# EAGLE board I2C shifter panelized (EAGLE 7.6.0)
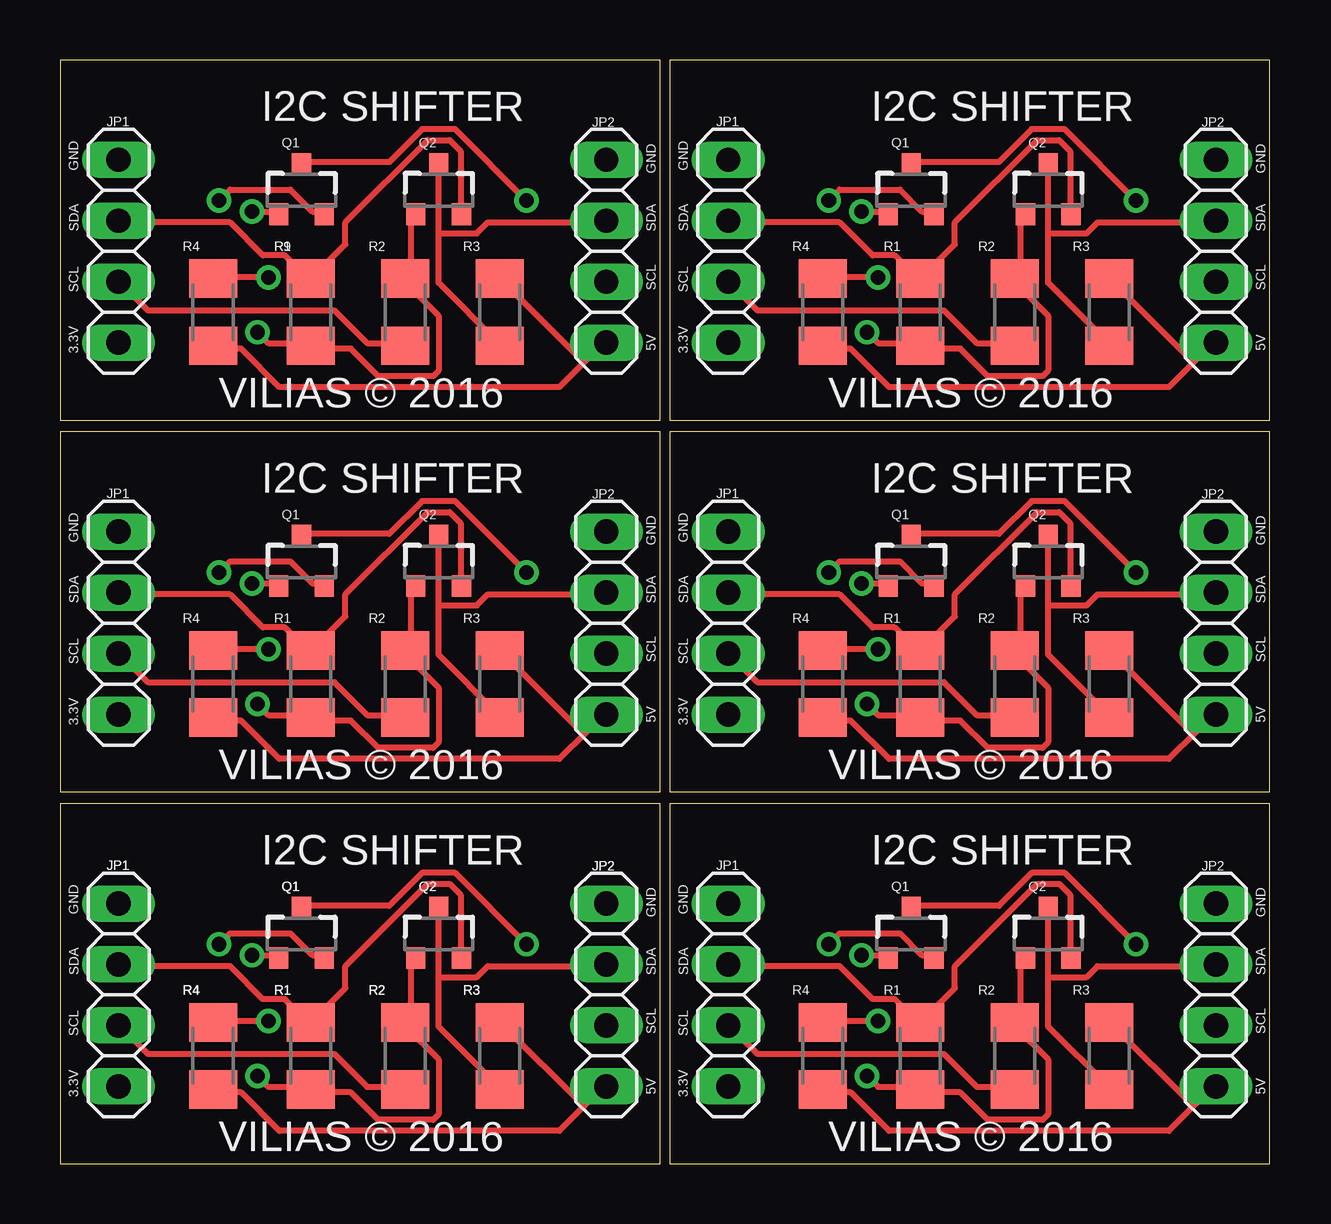
[diagram p0: board, top side]
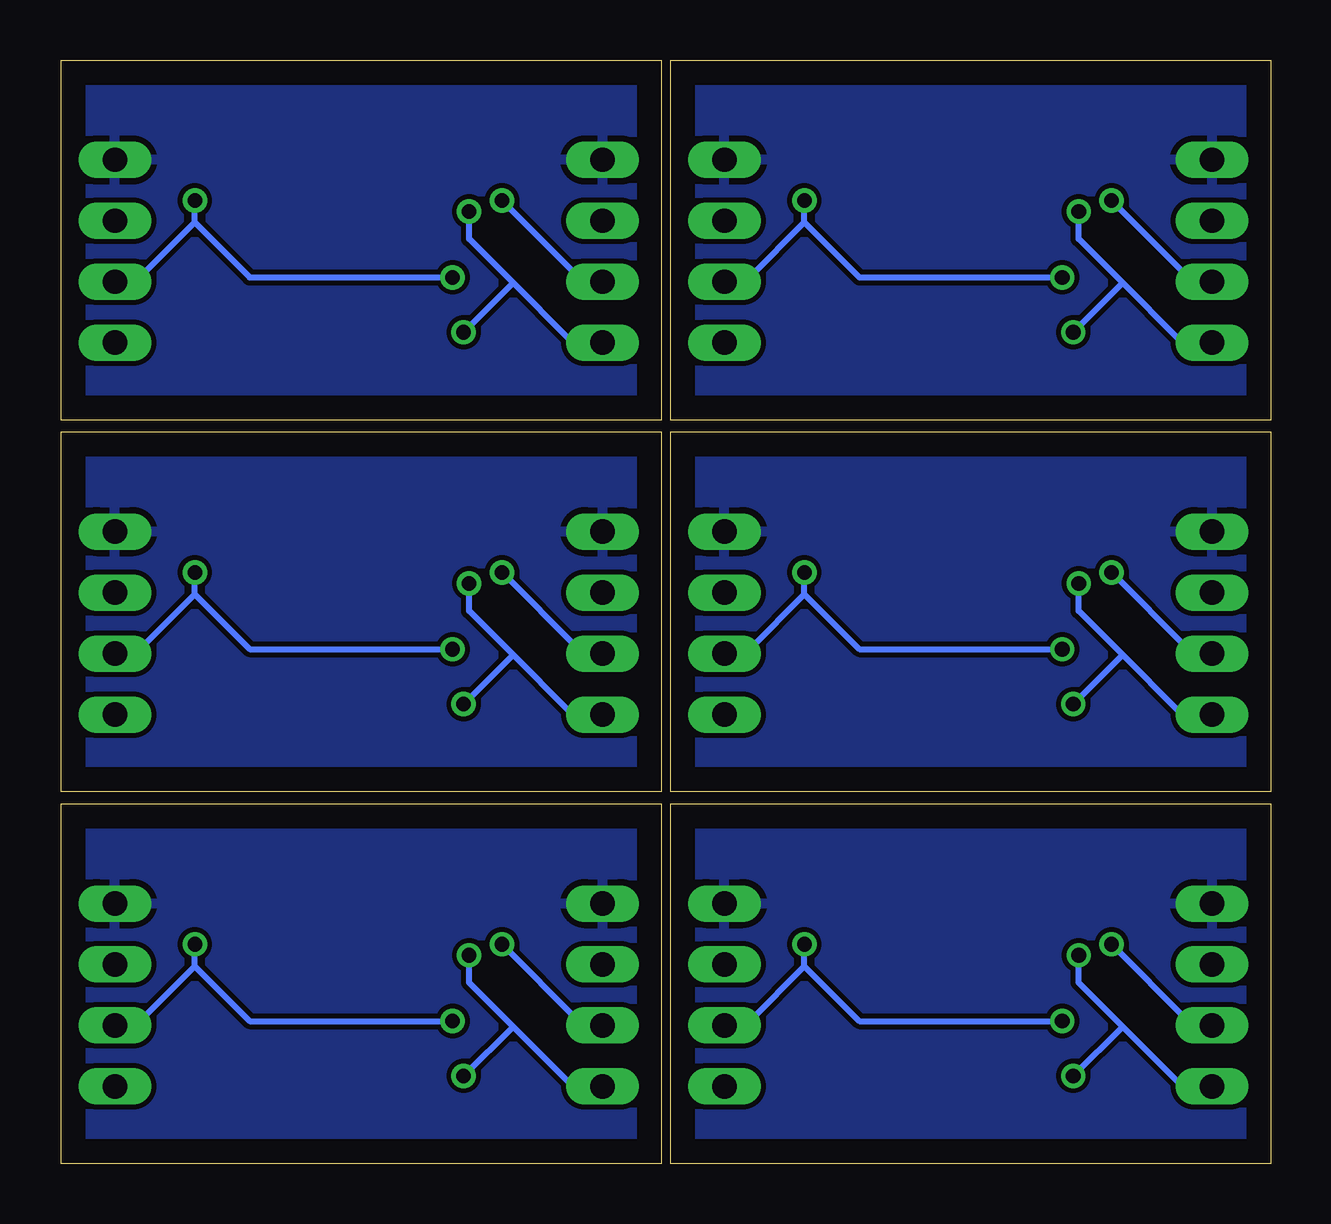
[diagram p1: board, bottom side, seen from below]

Size 50.4 x 45.99 mm. Coordinates in mm from the lower left corner, seen from the top.
Outline: 0,0 25,0 25,15 0,15 0,0
Outline: 0,15.49 25,15.49 25,30.49 0,30.49 0,15.49
Outline: 0,30.99 25,30.99 25,45.99 0,45.99 0,30.99
Outline: 25.4,0 50.4,0 50.4,15 25.4,15 25.4,0
Outline: 25.4,15.49 50.4,15.49 50.4,30.49 25.4,30.49 25.4,15.49
Outline: 25.4,30.99 50.4,30.99 50.4,45.99 25.4,45.99 25.4,30.99
Copper layers (1*16): Top 0.035mm / dielectric 1.5mm / Bottom 0.035mm
Design rules "default": minimum track width 10mil, minimum drill 24mil, track to track 8mil, track to pad 8mil, pad to pad 8mil, via to via 8mil, smd to smd 8mil, copper to edge 40mil, drill to drill 8mil, minimum pad ring 10mil, minimum via ring 8mil, stop-mask expansion 4mil, vias tented up to drill 0mil, thermal gap 10mil

## Footprints (pad centres in the part's own frame; a part is rotated, then mirrored left to right if it is on the bottom)
1X04 = drill 1.016 long: 1 -3.81,0; 2 -1.27,0; 3 1.27,0; 4 3.81,0
SOT23-3 = smd 0.8 x 0.9: 1 -0.95,-1; 2 0.95,-1; 3 0,1.1
M1206 = smd 1.6 x 2: 1 -1.4,0; 2 1.4,0

## Placement (x,y rotation side)
JP1  3.3V  [1X04]  2.44,7.03 90 top
JP2  5V  [1X04]  22.76,7.03 90 top
JP3  3.3V  [1X04]  2.44,22.53 90 top
JP4  5V  [1X04]  22.76,22.53 90 top
JP5  3.3V  [1X04]  2.44,38.02 90 top
JP6  5V  [1X04]  22.76,38.02 90 top
JP7  3.3V  [1X04]  27.84,7.03 90 top
JP8  5V  [1X04]  48.16,7.03 90 top
JP9  3.3V  [1X04]  27.84,22.53 90 top
JP10  5V  [1X04]  48.16,22.53 90 top
JP11  3.3V  [1X04]  27.84,38.02 90 top
JP12  5V  [1X04]  48.16,38.02 90 top
Q1  BSS138  [SOT23-3]  10.06,9.57 0 top
Q2  BSS138  [SOT23-3]  15.78,9.57 0 top
Q3  BSS138  [SOT23-3]  10.06,25.07 0 top
Q4  BSS138  [SOT23-3]  15.78,25.07 0 top
Q5  BSS138  [SOT23-3]  10.06,40.56 0 top
Q6  BSS138  [SOT23-3]  15.78,40.56 0 top
Q7  BSS138  [SOT23-3]  35.46,9.57 0 top
Q8  BSS138  [SOT23-3]  41.18,9.57 0 top
Q9  BSS138  [SOT23-3]  35.46,25.07 0 top
Q10  BSS138  [SOT23-3]  41.18,25.07 0 top
Q11  BSS138  [SOT23-3]  35.46,40.56 0 top
Q12  BSS138  [SOT23-3]  41.18,40.56 0 top
R1  10K  [M1206]  10.44,4.49 270 top
R2  10K  [M1206]  14.38,4.49 90 top
R3  10K  [M1206]  18.32,4.49 90 top
R4  10K  [M1206]  6.38,4.49 270 top
R5  10K  [M1206]  10.44,19.99 270 top
R6  10K  [M1206]  14.38,19.99 90 top
R7  10K  [M1206]  18.32,19.99 90 top
R8  10K  [M1206]  6.38,19.99 270 top
R9  10K  [M1206]  10.44,35.48 270 top
R10  10K  [M1206]  14.38,35.48 90 top
R11  10K  [M1206]  18.32,35.48 90 top
R12  10K  [M1206]  6.38,35.48 270 top
R13  10K  [M1206]  35.84,4.49 270 top
R14  10K  [M1206]  39.78,4.49 90 top
R15  10K  [M1206]  43.72,4.49 90 top
R16  10K  [M1206]  31.78,4.49 270 top
R17  10K  [M1206]  35.84,19.99 270 top
R18  10K  [M1206]  39.78,19.99 90 top
R19  10K  [M1206]  43.72,19.99 90 top
R20  10K  [M1206]  31.78,19.99 270 top
R21  10K  [M1206]  35.84,35.48 270 top
R22  10K  [M1206]  39.78,35.48 90 top
R23  10K  [M1206]  43.72,35.48 90 top
R24  10K  [M1206]  31.78,35.48 270 top

## Library data of the parts
JP1-JP12 = pinhead
Q1-Q12 = SparkFun-DiscreteSemi; PROD_ID: TRANS-00830
R1-R24 = rcl

## Nets
3.3V: JP1.1 Q1.1 Q2.1 R1.2 R2.2
3.3V1: JP3.1 Q3.1 Q4.1 R5.2 R6.2
3.3V2: JP5.1 Q5.1 Q6.1 R9.2 R10.2
3.3V3: JP7.1 Q7.1 Q8.1 R13.2 R14.2
3.3V4: JP9.1 Q9.1 Q10.1 R17.2 R18.2
3.3V5: JP11.1 Q11.1 Q12.1 R21.2 R22.2
+5V: JP2.1 R3.2 R4.2
+5V1: JP4.1 R7.2 R8.2
+5V2: JP6.1 R11.2 R12.2
+5V3: JP8.1 R15.2 R16.2
+5V4: JP10.1 R19.2 R20.2
+5V5: JP12.1 R23.2 R24.2
GND: JP1.4 JP2.4
GND1: JP3.4 JP4.4
GND2: JP5.4 JP6.4
GND3: JP7.4 JP8.4
GND4: JP9.4 JP10.4
GND5: JP11.4 JP12.4
N$1: JP1.2 Q1.2 R2.1
N$2: JP1.3 Q2.2 R1.1
N$3: JP2.2 Q1.3 R4.1
N$4: JP2.3 Q2.3 R3.1
N$5: JP3.2 Q3.2 R6.1
N$6: JP3.3 Q4.2 R5.1
N$7: JP4.2 Q3.3 R8.1
N$8: JP4.3 Q4.3 R7.1
N$9: JP5.2 Q5.2 R10.1
N$10: JP5.3 Q6.2 R9.1
N$11: JP6.2 Q5.3 R12.1
N$12: JP6.3 Q6.3 R11.1
N$13: JP7.2 Q7.2 R14.1
N$14: JP7.3 Q8.2 R13.1
N$15: JP8.2 Q7.3 R16.1
N$16: JP8.3 Q8.3 R15.1
N$17: JP9.2 Q9.2 R18.1
N$18: JP9.3 Q10.2 R17.1
N$19: JP10.2 Q9.3 R20.1
N$20: JP10.3 Q10.3 R19.1
N$21: JP11.2 Q11.2 R22.1
N$22: JP11.3 Q12.2 R21.1
N$23: JP12.2 Q11.3 R24.1
N$24: JP12.3 Q12.3 R23.1

## Tracks (layer width: path | path; a pad name or v marks a point on that pad's centre or on a via)
3.3V  (via drill 0.61)
  Top 0.254: Q2.1 14.63,8.46 14.63,6.17 14.4,5.94 R2.2 14.4,5.71 15.77,4.34 15.77,2.06 15.54,1.83 13.26,1.83 12.12,2.97 10.52,2.97 R1.2 10.29,3.2 8.69,3.2 v8.23,3.66 | v8,8.69 8.91,8.69 Q1.1
  Bottom 0.254: v8,8.69 8,7.54 6.17,5.71 | 6.17,5.71 3.89,3.43 2.52,3.43 JP1.1 | 6.17,5.71 v8.23,3.66
3.3V1  (via drill 0.61)
  Top 0.254: Q4.1 14.63,23.95 14.63,21.67 14.4,21.44 R6.2 14.4,21.21 15.77,19.84 15.77,17.55 15.54,17.32 13.26,17.32 12.12,18.47 10.52,18.47 R5.2 10.29,18.69 8.69,18.69 v8.23,19.15 | v8,24.18 8.91,24.18 Q3.1
  Bottom 0.254: v8,24.18 8,23.04 6.17,21.21 | 6.17,21.21 3.89,18.92 2.52,18.92 JP3.1 | 6.17,21.21 v8.23,19.15
3.3V2  (via drill 0.61)
  Top 0.254: Q6.1 14.63,39.45 14.63,37.16 14.4,36.93 R10.2 14.4,36.7 15.77,35.33 15.77,33.05 15.54,32.82 13.26,32.82 12.12,33.96 10.52,33.96 R9.2 10.29,34.19 8.69,34.19 v8.23,34.65 | v8,39.67 8.91,39.67 Q5.1
  Bottom 0.254: v8,39.67 8,38.53 6.17,36.7 | 6.17,36.7 3.89,34.42 2.52,34.42 JP5.1 | 6.17,36.7 v8.23,34.65
3.3V3  (via drill 0.61)
  Top 0.254: Q8.1 40.03,8.46 40.03,6.17 39.8,5.94 R14.2 39.8,5.71 41.17,4.34 41.17,2.06 40.95,1.83 38.66,1.83 37.52,2.97 35.92,2.97 R13.2 35.69,3.2 34.09,3.2 v33.63,3.66 | v33.4,8.69 34.31,8.69 Q7.1
  Bottom 0.254: v33.4,8.69 33.4,7.54 31.57,5.71 | 31.57,5.71 29.29,3.43 27.91,3.43 JP7.1 | 31.57,5.71 v33.63,3.66
3.3V4  (via drill 0.61)
  Top 0.254: Q10.1 40.03,23.95 40.03,21.67 39.8,21.44 R18.2 39.8,21.21 41.17,19.84 41.17,17.55 40.95,17.32 38.66,17.32 37.52,18.47 35.92,18.47 R17.2 35.69,18.69 34.09,18.69 v33.63,19.15 | v33.4,24.18 34.31,24.18 Q9.1
  Bottom 0.254: v33.4,24.18 33.4,23.04 31.57,21.21 | 31.57,21.21 29.29,18.92 27.91,18.92 JP9.1 | 31.57,21.21 v33.63,19.15
3.3V5  (via drill 0.61)
  Top 0.254: Q12.1 40.03,39.45 40.03,37.16 39.8,36.93 R22.2 39.8,36.7 41.17,35.33 41.17,33.05 40.95,32.82 38.66,32.82 37.52,33.96 35.92,33.96 R21.2 35.69,34.19 34.09,34.19 v33.63,34.65 | v33.4,39.67 34.31,39.67 Q11.1
  Bottom 0.254: v33.4,39.67 33.4,38.53 31.57,36.7 | 31.57,36.7 29.29,34.42 27.91,34.42 JP11.1 | 31.57,36.7 v33.63,34.65
+5V
  Top 0.254: 21.95,2.52 22.63,3.2 JP2.1 21.95,2.52 | 21.95,2.52 20.8,1.37 9.14,1.37 7.54,2.97 6.4,2.97 R4.2 | 21.95,2.52 21.72,2.52 18.52,5.71 R3.2
+5V1
  Top 0.254: 21.95,18.01 22.63,18.69 JP4.1 21.95,18.01 | 21.95,18.01 20.8,16.87 9.14,16.87 7.54,18.47 6.4,18.47 R8.2 | 21.95,18.01 21.72,18.01 18.52,21.21 R7.2
+5V2
  Top 0.254: 21.95,33.5 22.63,34.19 JP6.1 21.95,33.5 | 21.95,33.5 20.8,32.36 9.14,32.36 7.54,33.96 6.4,33.96 R12.2 | 21.95,33.5 21.72,33.5 18.52,36.7 R11.2
+5V3
  Top 0.254: 47.35,2.52 48.03,3.2 JP8.1 47.35,2.52 | 47.35,2.52 46.2,1.37 34.54,1.37 32.94,2.97 31.8,2.97 R16.2 | 47.35,2.52 47.12,2.52 43.92,5.71 R15.2
+5V4
  Top 0.254: 47.35,18.01 48.03,18.69 JP10.1 47.35,18.01 | 47.35,18.01 46.2,16.87 34.54,16.87 32.94,18.47 31.8,18.47 R20.2 | 47.35,18.01 47.12,18.01 43.92,21.21 R19.2
+5V5
  Top 0.254: 47.35,33.5 48.03,34.19 JP12.1 47.35,33.5 | 47.35,33.5 46.2,32.36 34.54,32.36 32.94,33.96 31.8,33.96 R24.2 | 47.35,33.5 47.12,33.5 43.92,36.7 R23.2
GND
  pour Bottom: 0,14.99 24.89,14.99 24.89,0 0,0
GND1
  pour Bottom: 0,30.48 24.89,30.48 24.89,15.49 0,15.49
GND2
  pour Bottom: 0,45.97 24.89,45.97 24.89,30.99 0,30.99
GND3
  pour Bottom: 25.4,14.99 50.29,14.99 50.29,0 25.4,0
GND4
  pour Bottom: 25.4,30.48 50.29,30.48 50.29,15.49 25.4,15.49
GND5
  pour Bottom: 25.4,45.97 50.29,45.97 50.29,30.99 25.4,30.99
N$1  (via drill 0.61)
  Top 0.254: v6.63,9.14 7.09,9.6 9.6,9.6 10.52,8.69 10.97,8.69 Q1.2 | R2.1 14.17,3.2 12.8,3.2 11.43,4.57 3.66,4.57 2.52,5.71 JP1.2
  Bottom 0.254: v6.63,9.14 3.43,5.94 2.52,5.94 JP1.2
N$2
  Top 0.254: Q2.2 16.69,8.69 16.69,11.2 16.23,11.66 15.32,11.66 11.89,8.23 11.89,7.32 10.52,5.94 R1.1 10.29,5.94 9.37,6.86 8.46,6.86 7.09,8.23 2.52,8.23 JP1.3
N$3  (via drill 0.61)
  Top 0.254: v19.43,9.14 16.46,12.12 15.09,12.12 13.72,10.74 10.29,10.74 Q1.3 | v8.69,5.94 6.4,5.94 R4.1
  Bottom 0.254: 19.43,8.23 v19.43,9.14 | 19.43,8.23 21.72,5.94 22.63,5.94 JP2.2 | v8.69,5.94 17.14,5.94 19.43,8.23
N$4
  Top 0.254: 15.77,7.77 15.77,5.71 18.29,3.2 R3.1 | 15.77,7.77 15.77,10.52 Q2.3 | 15.77,7.77 17.37,7.77 17.83,8.23 22.63,8.23 JP2.3
N$5  (via drill 0.61)
  Top 0.254: v6.63,24.64 7.09,25.09 9.6,25.09 10.52,24.18 10.97,24.18 Q3.2 | R6.1 14.17,18.69 12.8,18.69 11.43,20.07 3.66,20.07 2.52,21.21 JP3.2
  Bottom 0.254: v6.63,24.64 3.43,21.44 2.52,21.44 JP3.2
N$6
  Top 0.254: Q4.2 16.69,24.18 16.69,26.7 16.23,27.15 15.32,27.15 11.89,23.72 11.89,22.81 10.52,21.44 R5.1 10.29,21.44 9.37,22.35 8.46,22.35 7.09,23.72 2.52,23.72 JP3.3
N$7  (via drill 0.61)
  Top 0.254: v19.43,24.64 16.46,27.61 15.09,27.61 13.72,26.24 10.29,26.24 Q3.3 | v8.69,21.44 6.4,21.44 R8.1
  Bottom 0.254: 19.43,23.72 v19.43,24.64 | 19.43,23.72 21.72,21.44 22.63,21.44 JP4.2 | v8.69,21.44 17.14,21.44 19.43,23.72
N$8
  Top 0.254: 15.77,23.27 15.77,21.21 18.29,18.69 R7.1 | 15.77,23.27 15.77,26.01 Q4.3 | 15.77,23.27 17.37,23.27 17.83,23.72 22.63,23.72 JP4.3
N$9  (via drill 0.61)
  Top 0.254: v6.63,40.13 7.09,40.59 9.6,40.59 10.52,39.67 10.97,39.67 Q5.2 | R10.1 14.17,34.19 12.8,34.19 11.43,35.56 3.66,35.56 2.52,36.7 JP5.2
  Bottom 0.254: v6.63,40.13 3.43,36.93 2.52,36.93 JP5.2
N$10
  Top 0.254: Q6.2 16.69,39.67 16.69,42.19 16.23,42.65 15.32,42.65 11.89,39.22 11.89,38.3 10.52,36.93 R9.1 10.29,36.93 9.37,37.85 8.46,37.85 7.09,39.22 2.52,39.22 JP5.3
N$11  (via drill 0.61)
  Top 0.254: v19.43,40.13 16.46,43.1 15.09,43.1 13.72,41.73 10.29,41.73 Q5.3 | v8.69,36.93 6.4,36.93 R12.1
  Bottom 0.254: 19.43,39.22 v19.43,40.13 | 19.43,39.22 21.72,36.93 22.63,36.93 JP6.2 | v8.69,36.93 17.14,36.93 19.43,39.22
N$12
  Top 0.254: 15.77,38.76 15.77,36.7 18.29,34.19 R11.1 | 15.77,38.76 15.77,41.5 Q6.3 | 15.77,38.76 17.37,38.76 17.83,39.22 22.63,39.22 JP6.3
N$13  (via drill 0.61)
  Top 0.254: v32.03,9.14 32.49,9.6 35,9.6 35.92,8.69 36.37,8.69 Q7.2 | R14.1 39.57,3.2 38.2,3.2 36.83,4.57 29.06,4.57 27.91,5.71 JP7.2
  Bottom 0.254: v32.03,9.14 28.83,5.94 27.91,5.94 JP7.2
N$14
  Top 0.254: Q8.2 42.09,8.69 42.09,11.2 41.63,11.66 40.72,11.66 37.29,8.23 37.29,7.32 35.92,5.94 R13.1 35.69,5.94 34.77,6.86 33.86,6.86 32.49,8.23 27.91,8.23 JP7.3
N$15  (via drill 0.61)
  Top 0.254: v44.83,9.14 41.86,12.12 40.49,12.12 39.12,10.74 35.69,10.74 Q7.3 | v34.09,5.94 31.8,5.94 R16.1
  Bottom 0.254: 44.83,8.23 v44.83,9.14 | 44.83,8.23 47.12,5.94 48.03,5.94 JP8.2 | v34.09,5.94 42.55,5.94 44.83,8.23
N$16
  Top 0.254: 41.17,7.77 41.17,5.71 43.69,3.2 R15.1 | 41.17,7.77 41.17,10.52 Q8.3 | 41.17,7.77 42.77,7.77 43.23,8.23 48.03,8.23 JP8.3
N$17  (via drill 0.61)
  Top 0.254: v32.03,24.64 32.49,25.09 35,25.09 35.92,24.18 36.37,24.18 Q9.2 | R18.1 39.57,18.69 38.2,18.69 36.83,20.07 29.06,20.07 27.91,21.21 JP9.2
  Bottom 0.254: v32.03,24.64 28.83,21.44 27.91,21.44 JP9.2
N$18
  Top 0.254: Q10.2 42.09,24.18 42.09,26.7 41.63,27.15 40.72,27.15 37.29,23.72 37.29,22.81 35.92,21.44 R17.1 35.69,21.44 34.77,22.35 33.86,22.35 32.49,23.72 27.91,23.72 JP9.3
N$19  (via drill 0.61)
  Top 0.254: v44.83,24.64 41.86,27.61 40.49,27.61 39.12,26.24 35.69,26.24 Q9.3 | v34.09,21.44 31.8,21.44 R20.1
  Bottom 0.254: 44.83,23.72 v44.83,24.64 | 44.83,23.72 47.12,21.44 48.03,21.44 JP10.2 | v34.09,21.44 42.55,21.44 44.83,23.72
N$20
  Top 0.254: 41.17,23.27 41.17,21.21 43.69,18.69 R19.1 | 41.17,23.27 41.17,26.01 Q10.3 | 41.17,23.27 42.77,23.27 43.23,23.72 48.03,23.72 JP10.3
N$21  (via drill 0.61)
  Top 0.254: v32.03,40.13 32.49,40.59 35,40.59 35.92,39.67 36.37,39.67 Q11.2 | R22.1 39.57,34.19 38.2,34.19 36.83,35.56 29.06,35.56 27.91,36.7 JP11.2
  Bottom 0.254: v32.03,40.13 28.83,36.93 27.91,36.93 JP11.2
N$22
  Top 0.254: Q12.2 42.09,39.67 42.09,42.19 41.63,42.65 40.72,42.65 37.29,39.22 37.29,38.3 35.92,36.93 R21.1 35.69,36.93 34.77,37.85 33.86,37.85 32.49,39.22 27.91,39.22 JP11.3
N$23  (via drill 0.61)
  Top 0.254: v44.83,40.13 41.86,43.1 40.49,43.1 39.12,41.73 35.69,41.73 Q11.3 | v34.09,36.93 31.8,36.93 R24.1
  Bottom 0.254: 44.83,39.22 v44.83,40.13 | 44.83,39.22 47.12,36.93 48.03,36.93 JP12.2 | v34.09,36.93 42.55,36.93 44.83,39.22
N$24
  Top 0.254: 41.17,38.76 41.17,36.7 43.69,34.19 R23.1 | 41.17,38.76 41.17,41.5 Q12.3 | 41.17,38.76 42.77,38.76 43.23,39.22 48.03,39.22 JP12.3

## Text on the board
tNames: I2C SHIFTER | I2C SHIFTER | GND | GND | GND | GND | SDA | SDA | SDA | SDA | SCL | SCL | SCL | SCL | 3.3V | 5V | 3.3V | 5V | VILIAS © 2016 | VILIAS © 2016 | I2C SHIFTER | I2C SHIFTER | GND | GND | GND | GND | SDA | SDA | SDA | SDA | SCL | SCL | SCL | SCL | 3.3V | 5V | 3.3V | 5V | VILIAS © 2016 | VILIAS © 2016 | I2C SHIFTER | I2C SHIFTER | GND | GND | GND | GND | SDA | SDA | SDA | SDA | SCL | SCL | SCL | SCL | 3.3V | 5V | 3.3V | 5V | VILIAS © 2016 | VILIAS © 2016
_tNames: JP1 | JP2 | JP1 | JP2 | Q1 | Q2 | Q1 | Q2 | R4 | R1 | R2 | R3 | R4 | R1 | R2 | R3 | JP1 | JP2 | JP1 | JP2 | Q1 | Q2 | Q1 | Q2 | R4 | R1 | R2 | R3 | R4 | R1 | R2 | R3 | JP1 | JP1 | JP2 | JP2 | JP1 | JP2 | Q1 | Q1 | Q2 | Q2 | Q1 | Q2 | R4 | R4 | R1 | R1 | R2 | R2 | R3 | R3 | R4 | R1 | R2 | R3